# Altium PCB Archim_TF_Bottom.PcbDoc
Units mil, origin at the board's own origin, x right, y up, seen from the top; angles counter-clockwise.
Board outline 5100 x 5050 mil, 2 copper layers (Top Layer, Bottom Layer); 177 components, 0 nets, 177 pads, 0 vias.
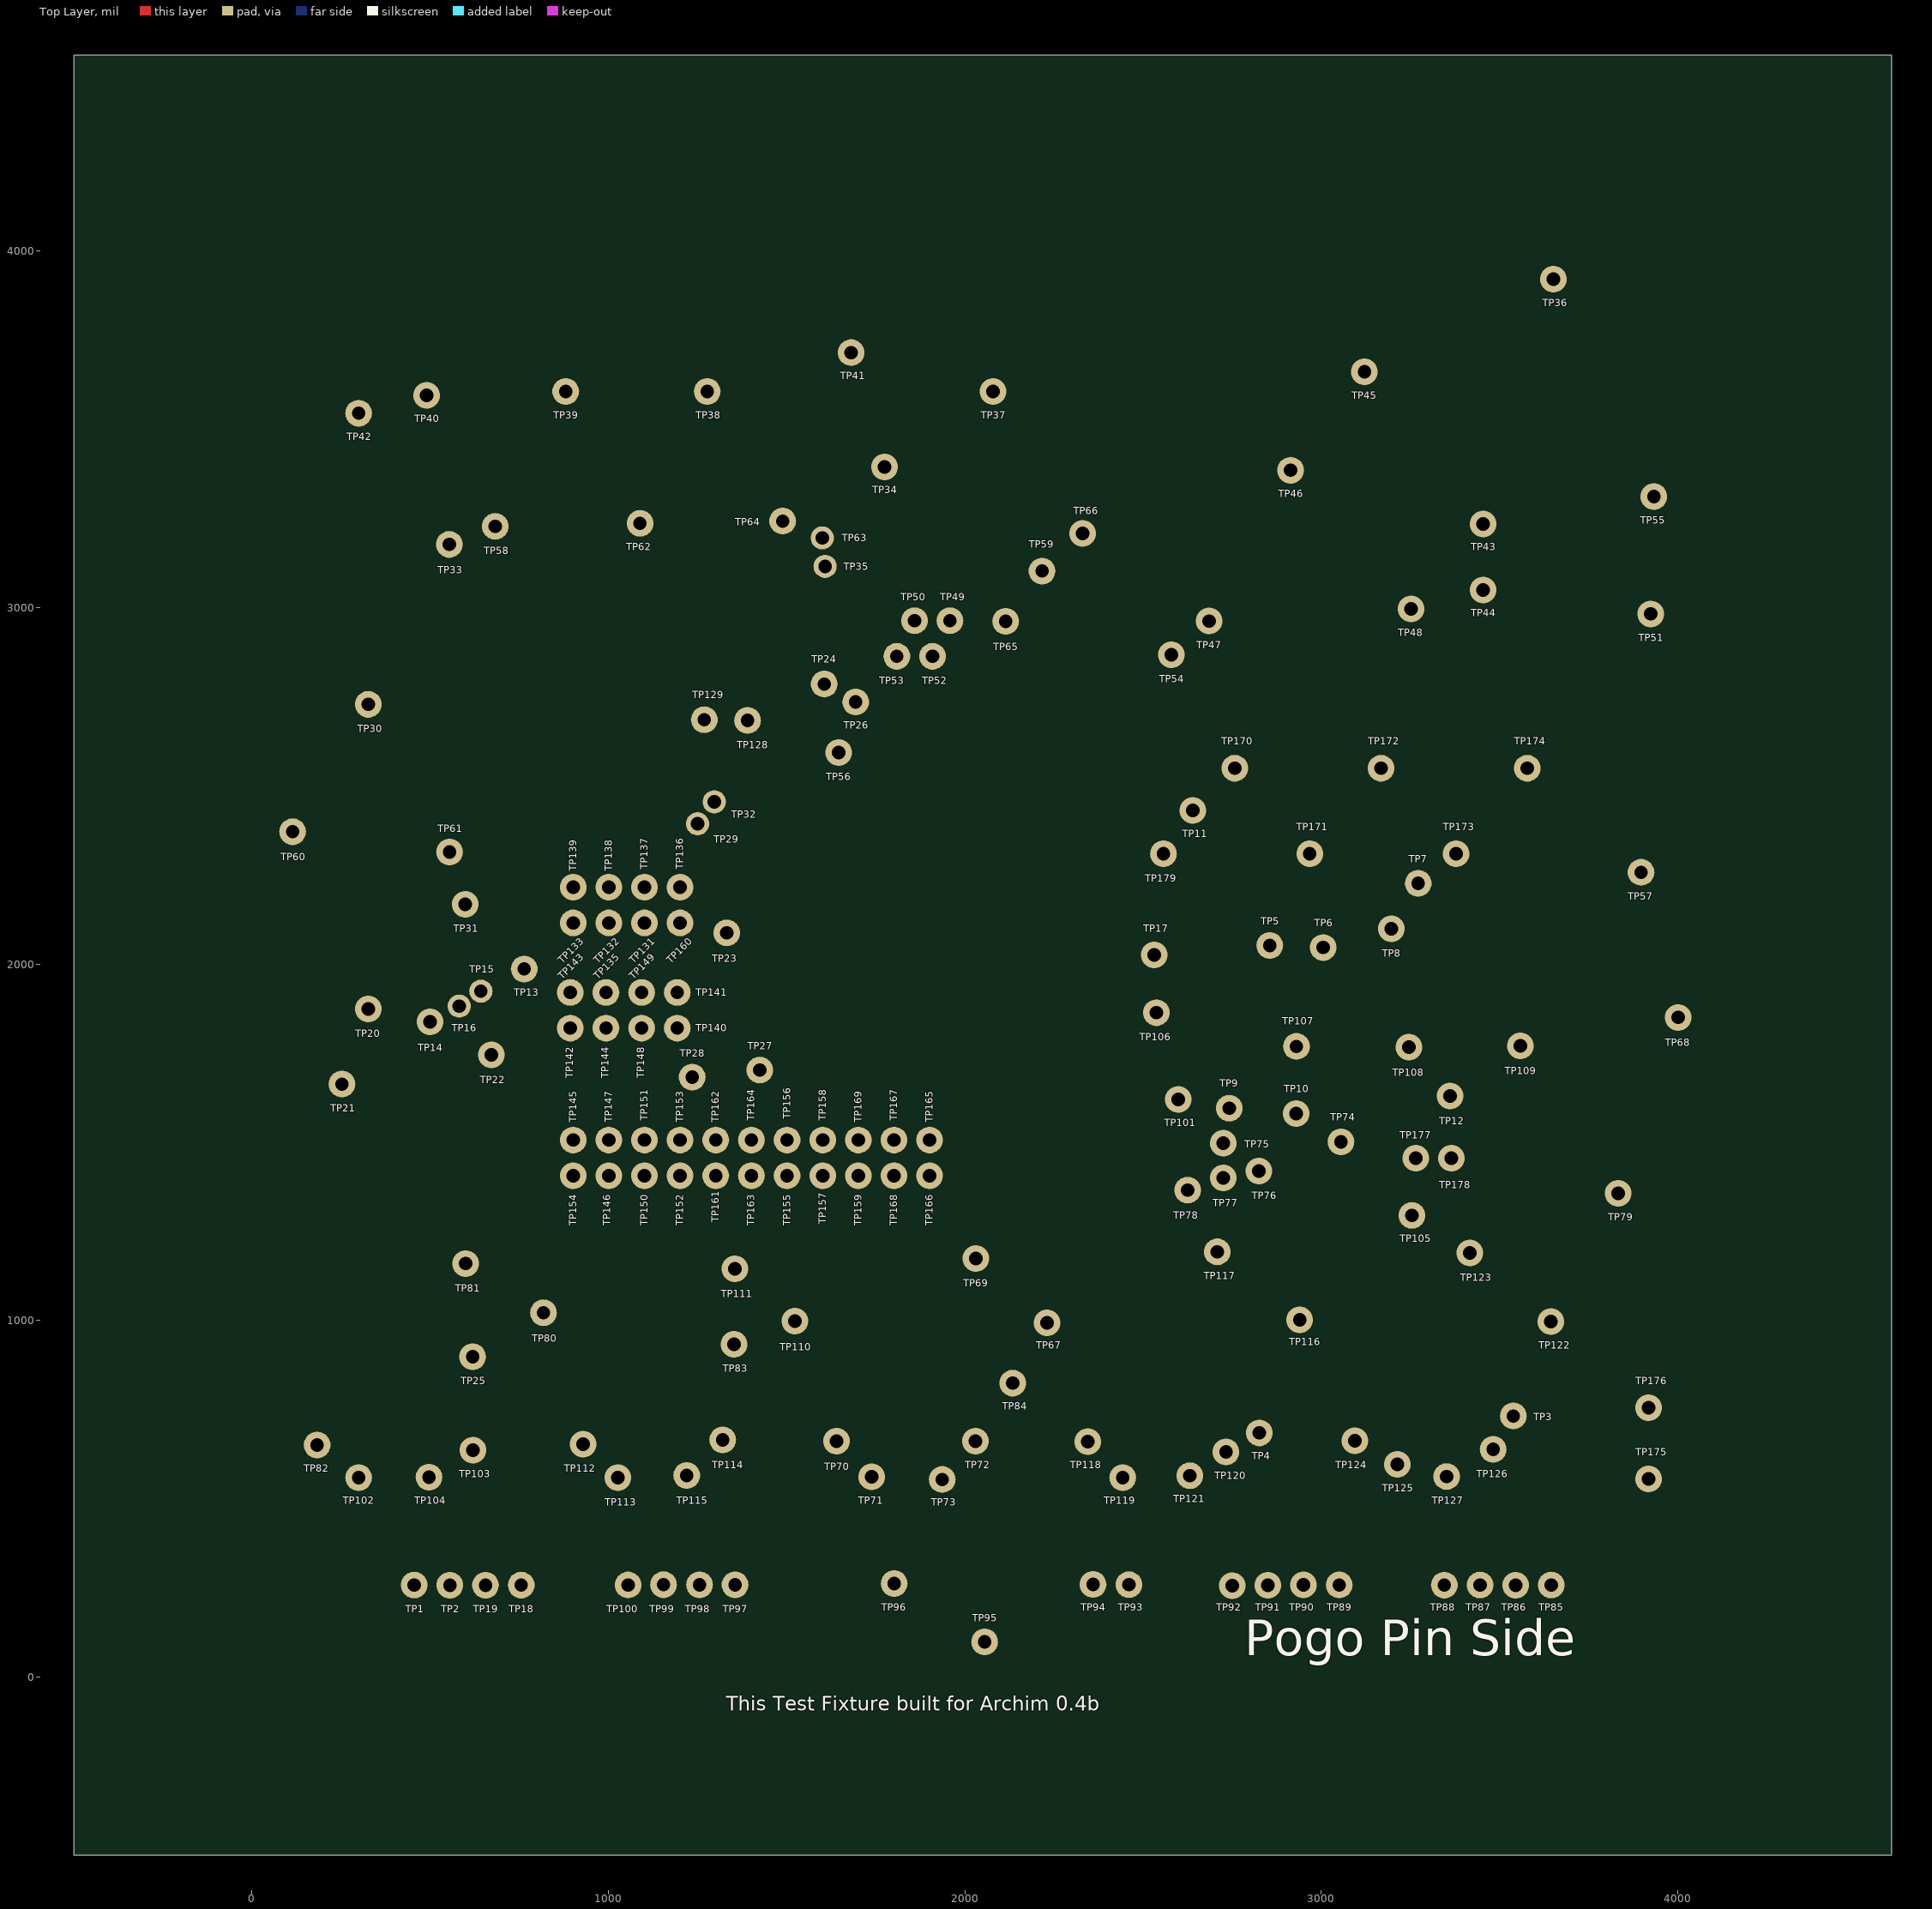
[diagram p0: Top Layer view]
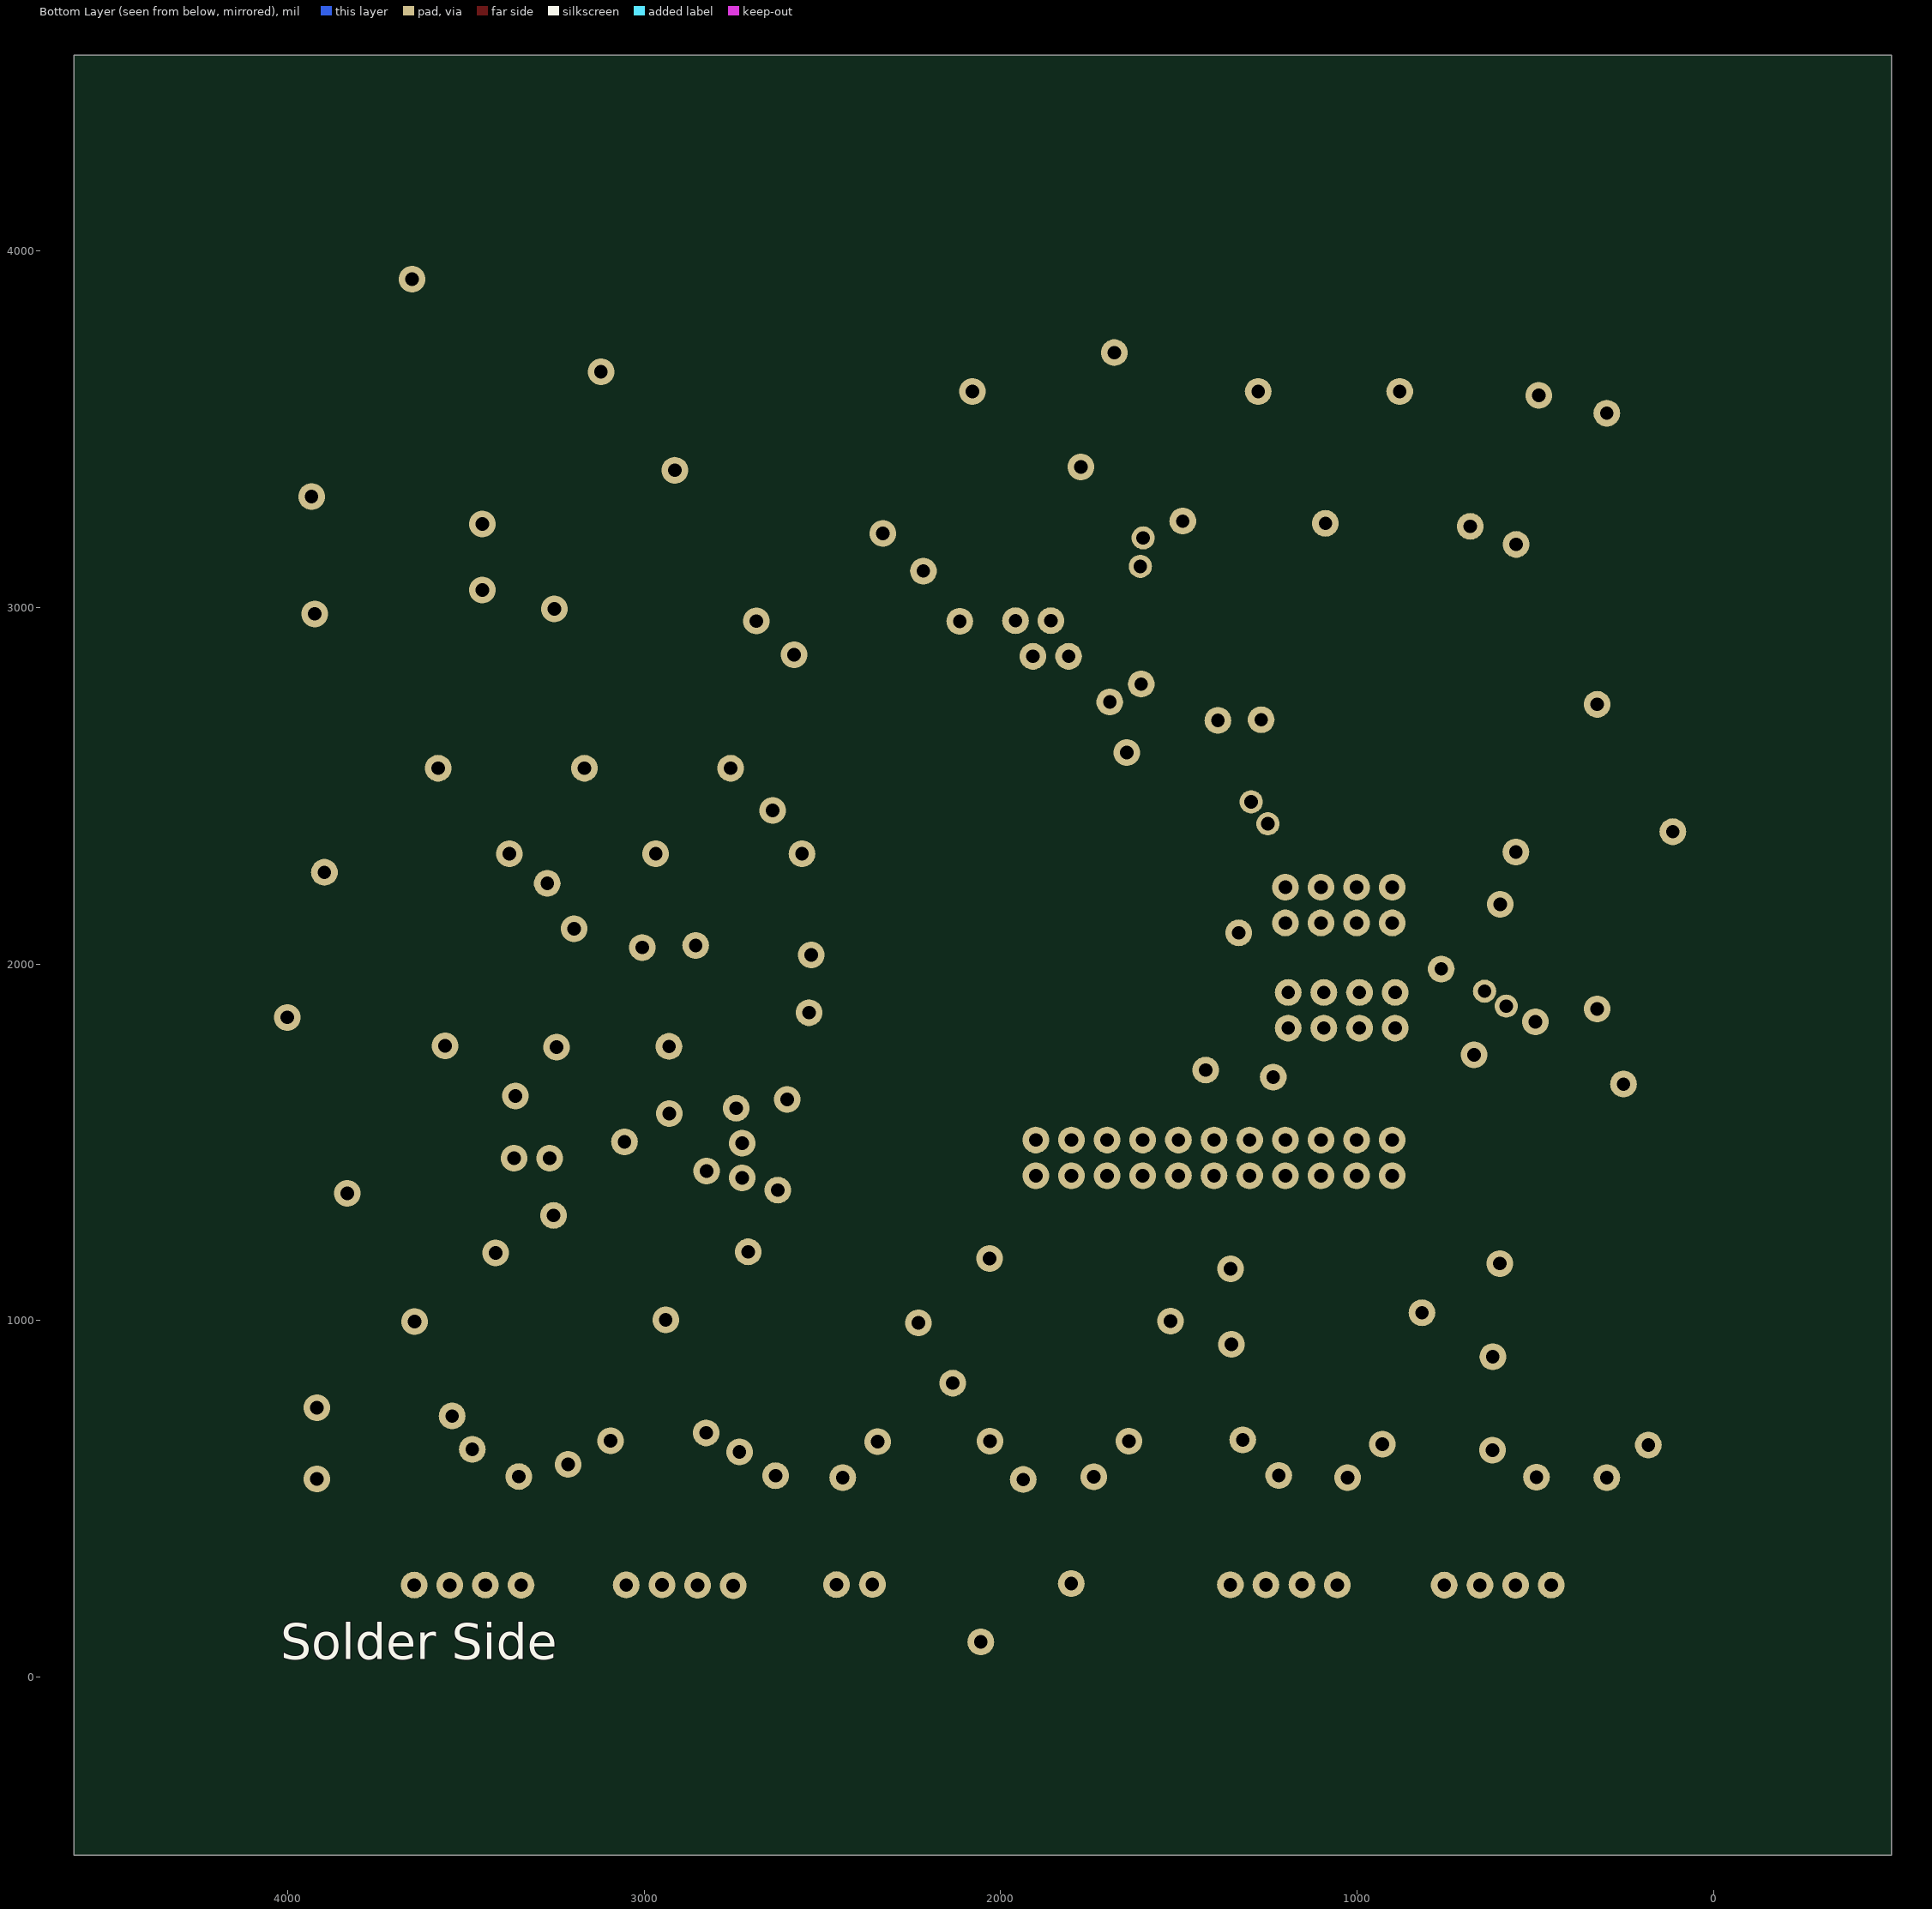
[diagram p1: Bottom Layer view, seen from below]

## Layer stack, top to bottom
Top Solder: solder mask 0.4, Solder Resist, Dk 3.5
Top Layer: signal copper 1.4
Dielectric 1: dielectric 12.6, FR-4, Dk 4.8
Bottom Layer: signal copper 1.4
Bottom Solder: solder mask 0.4, Solder Resist, Dk 3.5

## Board outline
-500,-500 -500,4550 4600,4550 4600,-500

## Design rules (kind name [scope] priority, off if disabled: settings)
Clearance [All] p1: gap=5
ComponentClearance [All] p1 off: gap=10 collisioncheckmode=3 verticalgap=10 showdistances=FALSE
PolygonConnect [All] p1: connectstyle=Relief reliefconductorwidth=10 reliefentries=4 polygonreliefangle="90 Angle" airgapwidth=10
RoutingVias [All] p1: holewidth=28 width=50 viastyle="Through Hole" minholewidth=28 minwidth=50 maxholewidth=28 maxwidth=50
SolderMaskExpansion [All] p1: expansion=4
Width [All] p1: maxlimit=10 minlimit=10 preferedwidth=10
29 further rules are at their usual default settings.

## Components (designator, comment, footprint, x,y, rotation, side; value= is the part's Value field where it differs from the comment)
TP1 "P100-T" POGO_38#1 455.07,257.55 r90 top locked
TP2 "P100-T" POGO_38#1 555.11,257.26 r90 top locked
TP3 "P100-T" POGO_38#1 3538.71,731.73 r90 top locked
TP4 "P100-T" POGO_38#1 2826.14,684.41 r90 top locked
TP5 "P100-T" POGO_38#1 2855.28,2051.98 r90 top locked
TP6 "P100-T" POGO_38#1 3005.38,2046.12 r90 top locked
TP7 "P100-T" POGO_38#1 3271.76,2226.09 r90 top locked
TP8 "P100-T" POGO_38#1 3196.57,2098.89 r90 top locked
TP9 "P100-T" POGO_38#1 2741.74,1595.23 r90 top locked
TP10 "P100-T" POGO_38#1 2929.38,1580.21 r90 top locked
TP11 "P100-T" POGO_38#1 2639.26,2430.44 r90 top locked
TP12 "P100-T" POGO_38#1 3361.1,1629.72 r90 top locked
TP13 "P100-T" POGO_38#1 763.61,1985.94 r270 top locked
TP14 "P100-T" POGO_38#1 499.36,1837.74 r270 top locked
TP15 "P100-T" POGO_38#2 641.95,1923.57 r270 top locked
TP16 "P100-T" POGO_38#2 581.2,1881.72 r270 top locked
TP17 "P100-T" POGO_38#1 2530.95,2025.32 r90 top locked
TP18 "P100-T" POGO_38#1 755.2,257.4 r90 top locked
TP19 "P100-T" POGO_38#1 655.01,257.07 r90 top locked
TP20 "P100-T" POGO_38#1 326.1,1873.72 r270 top locked
TP21 "P100-T" POGO_38#1 252.26,1662.8 r270 top locked
TP22 "P100-T" POGO_38#1 671.64,1744.99 r270 top locked
TP23 "P100-T" POGO_38#1 1331.65,2087.16 r270 top locked
TP24 "P100-T" POGO_38#1 1605.33,2785.13 r270 top locked
TP25 "P100-T" POGO_38#1 618.88,898.09 r90 top locked
TP26 "P100-T" POGO_38#1 1693.5,2734.88 r270 top locked
TP27 "P100-T" POGO_38#1 1424.39,1702.33 r270 top locked
TP28 "P100-T" POGO_38#1 1234.86,1682.67 r270 top locked
TP29 "P100-T" POGO_38#2 1249.97,2393.07 r270 top locked
TP30 "P100-T" POGO_38#1 325.83,2728.28 r270 top locked
TP31 "P100-T" POGO_38#1 598.26,2167.37 r270 top locked
TP32 "P100-T" POGO_38#2 1296.87,2454.68 r270 top locked
TP33 "P100-T" POGO_38#1 553.37,3176.95 r270 top locked
TP34 "P100-T" POGO_38#1 1774.74,3394.25 r270 top locked
TP35 "P100-T" POGO_38#2 1607.82,3115.3 r270 top locked
TP36 "P100-T" POGO_38#1 3651.08,3920.82 r90 top locked
TP37 "P100-T" POGO_38#1 2079,3606 r270 top locked
TP38 "P100-T" POGO_38#1 1277,3606 r270 top locked
TP39 "P100-T" POGO_38#1 880,3606 r90 top locked
TP40 "P100-T" POGO_38#1 490,3595 r180 top locked
TP41 "P100-T" POGO_38#1 1681,3715 r90 top locked
TP42 "P100-T" POGO_38#1 299,3545 r90 top locked
TP43 "P100-T" POGO_38#1 3454,3234 r90 top locked
TP44 "P100-T" POGO_38#1 3454,3049 r90 top locked
TP45 "P100-T" POGO_38#1 3121,3661 r0 top locked
TP46 "P100-T" POGO_38#1 2914,3385 r90 top locked
TP47 "P100-T" POGO_38#1 2685,2962 r90 top locked
TP48 "P100-T" POGO_38#1 3252,2996 r90 top locked
TP49 "P100-T" POGO_38#1 1958,2963 r180 top locked
TP50 "P100-T" POGO_38#1 1859,2963 r180 top locked
TP51 "P100-T" POGO_38#1 3924,2982 r0 top locked
TP52 "P100-T" POGO_38#1 1909,2863 r180 top locked
TP53 "P100-T" POGO_38#1 1809,2863 r180 top locked
TP54 "P100-T" POGO_38#1 2579,2867.6 r90 top locked
TP55 "P100-T" POGO_38#1 3933,3311 r90 top locked
TP56 "P100-T" POGO_38#1 1646,2593 r90 top locked
TP57 "P100-T" POGO_38#1 3897,2257 r90 top locked
TP58 "P100-T" POGO_38#1 682.01,3227.55 r270 top locked
TP59 "P100-T" POGO_38#1 2216.43,3102.28 r270 top locked
TP60 "P100-T" POGO_38#1 113.76,2370.99 r90 top locked
TP61 "P100-T" POGO_38#1 554.13,2313.98 r90 top locked
TP62 "P100-T" POGO_38#1 1088.47,3236.1 r270 top locked
TP63 "P100-T" POGO_38#2 1599.81,3195.25 r270 top locked
TP64 "P100-T" POGO_38#1 1488.67,3242.28 r270 top locked
TP65 "P100-T" POGO_38#1 2114.36,2961.17 r270 top locked
TP66 "P100-T" POGO_38#1 2330.2,3207.63 r270 top locked
TP67 "P100-T" POGO_38#1 2230.17,992.83 r270 top locked
TP68 "P100-T" POGO_38#1 4001,1850 r90 top locked
TP69 "P100-T" POGO_38#1 2030.63,1173.73 r270 top locked
TP70 "P100-T" POGO_38#1 1640,661.23 r270 top locked
TP71 "P100-T" POGO_38#1 1738.42,560.95 r270 top locked
TP72 "P100-T" POGO_38#1 2029.84,661.19 r270 top locked
TP73 "P100-T" POGO_38#1 1936.34,553.63 r270 top locked
TP74 "P100-T" POGO_38#1 3055.12,1500.98 r90 top locked
TP75 "P100-T" POGO_38#1 2725,1497 r180 top locked
TP76 "P100-T" POGO_38#1 2825,1419 r180 top locked
TP77 "P100-T" POGO_38#1 2725,1400 r180 top locked
TP78 "P100-T" POGO_38#1 2625,1365.5 r90 top locked
TP79 "P100-T" POGO_38#1 3833.05,1356.75 r90 top locked
TP80 "P100-T" POGO_38#1 817.67,1021.34 r270 top locked
TP81 "P100-T" POGO_38#1 599.14,1159.51 r270 top locked
TP82 "P100-T" POGO_38#1 182.54,650.37 r270 top locked
TP83 "P100-T" POGO_38#1 1352.2,932.66 r90 top locked
TP84 "P100-T" POGO_38#1 2134,824 r180 top locked
TP85 "P100-T" POGO_38#1 3645.02,257.5 r90 top locked
TP86 "P100-T" POGO_38#1 3544.97,257.19 r90 top locked
TP87 "P100-T" POGO_38#1 3445.14,257.48 r90 top locked
TP88 "P100-T" POGO_38#1 3345.14,257.36 r90 top locked
TP89 "P100-T" POGO_38#1 3050.17,257.72 r90 top locked
TP90 "P100-T" POGO_38#1 2949.94,257.8 r90 top locked
TP91 "P100-T" POGO_38#1 2850.01,256.9 r90 top locked
TP92 "P100-T" POGO_38#1 2749.96,255.81 r90 top locked
TP93 "P100-T" POGO_38#1 2460.31,258.64 r90 top locked
TP94 "P100-T" POGO_38#1 2359.56,259.04 r90 top locked
TP95 "P100-T" POGO_38#1 2055.49,97.88 r90 top locked
TP96 "P100-T" POGO_38#1 1801.51,261.69 r90 top locked
TP97 "P100-T" POGO_38#1 1355.14,258.33 r90 top locked
TP98 "P100-T" POGO_38#1 1255.5,258.47 r90 top locked
TP99 "P100-T" POGO_38#1 1154.44,258.58 r90 top locked
TP100 "P100-T" POGO_38#1 1055.15,257.68 r90 top locked
TP101 "P100-T" POGO_38#1 2598.81,1620.03 r90 top locked
TP102 "P100-T" POGO_38#1 299.02,559.02 r270 top locked
TP103 "P100-T" POGO_38#1 619.95,636.18 r270 top locked
TP104 "P100-T" POGO_38#1 496.47,560.23 r270 top locked
TP105 "P100-T" POGO_38#1 3253.95,1294.54 r90 top locked
TP106 "P100-T" POGO_38#1 2537.3,1863.29 r270 top locked
TP107 "P100-T" POGO_38#1 2930.16,1768.62 r270 top locked
TP108 "P100-T" POGO_38#1 3245.48,1766.37 r270 top locked
TP109 "P100-T" POGO_38#1 3558.15,1769.98 r270 top locked
TP110 "P100-T" POGO_38#1 1523.05,998.11 r270 top locked
TP111 "P100-T" POGO_38#1 1354.57,1144.79 r270 top locked
TP112 "P100-T" POGO_38#1 928.68,652.69 r270 top locked
TP113 "P100-T" POGO_38#1 1026.53,558.9 r270 top locked
TP114 "P100-T" POGO_38#1 1320.5,664.98 r270 top locked
TP115 "P100-T" POGO_38#1 1219.48,565.04 r270 top locked
TP116 "P100-T" POGO_38#1 2939.35,1001.52 r270 top locked
TP117 "P100-T" POGO_38#1 2708.12,1192.36 r270 top locked
TP118 "P100-T" POGO_38#1 2344.82,659.56 r270 top locked
TP119 "P100-T" POGO_38#1 2442.74,559.09 r270 top locked
TP120 "P100-T" POGO_38#1 2732.45,630.87 r270 top locked
TP121 "P100-T" POGO_38#1 2631.38,564.32 r270 top locked
TP122 "P100-T" POGO_38#1 3644.15,996.61 r270 top locked
TP123 "P100-T" POGO_38#1 3416.81,1189.48 r270 top locked
TP124 "P100-T" POGO_38#1 3094.09,662.21 r270 top locked
TP125 "P100-T" POGO_38#1 3213.27,595.91 r270 top locked
TP126 "P100-T" POGO_38#1 3482.12,638.22 r270 top locked
TP127 "P100-T" POGO_38#1 3351.48,561.97 r270 top locked
TP128 "P100-T" POGO_38#1 1390.19,2682.96 r90 top locked
TP129 "P100-T" POGO_38#1 1268.87,2685.03 r90 top locked
TP131 "P100-T" POGO_38#1 1101,2115 r90 top
TP132 "P100-T" POGO_38#1 1001,2115 r90 top
TP133 "P100-T" POGO_38#1 901,2115 r90 top
TP135 "P100-T" POGO_38#1 993,1920 r90 top
TP136 "P100-T" POGO_38#1 1201,2215 r90 top
TP137 "P100-T" POGO_38#1 1101,2215 r90 top
TP138 "P100-T" POGO_38#1 1001,2215 r90 top
TP139 "P100-T" POGO_38#1 901,2215 r90 top
TP140 "P100-T" POGO_38#1 1193,1820 r90 top
TP141 "P100-T" POGO_38#1 1193,1920 r90 top
TP142 "P100-T" POGO_38#1 893,1820 r90 top
TP143 "P100-T" POGO_38#1 893,1920 r90 top
TP144 "P100-T" POGO_38#1 993,1820 r90 top
TP145 "P100-T" POGO_38#1 901,1506 r90 top
TP146 "P100-T" POGO_38#1 1001,1406 r90 top
TP147 "P100-T" POGO_38#1 1001,1506 r90 top
TP148 "P100-T" POGO_38#1 1093,1820 r90 top
TP149 "P100-T" POGO_38#1 1093,1920 r90 top
TP150 "P100-T" POGO_38#1 1101,1406 r90 top
TP151 "P100-T" POGO_38#1 1101,1506 r90 top
TP152 "P100-T" POGO_38#1 1201,1406 r90 top
TP153 "P100-T" POGO_38#1 1201,1506 r90 top
TP154 "P100-T" POGO_38#1 901,1406 r90 top
TP155 "P100-T" POGO_38#1 1501,1406 r90 top
TP156 "P100-T" POGO_38#1 1501,1506 r90 top
TP157 "P100-T" POGO_38#1 1601,1406 r90 top
TP158 "P100-T" POGO_38#1 1601,1506 r90 top
TP159 "P100-T" POGO_38#1 1701,1406 r90 top
TP160 "P100-T" POGO_38#1 1201,2115 r90 top
TP161 "P100-T" POGO_38#1 1301,1406 r90 top
TP162 "P100-T" POGO_38#1 1301,1506 r90 top
TP163 "P100-T" POGO_38#1 1401,1406 r90 top
TP164 "P100-T" POGO_38#1 1401,1506 r90 top
TP165 "P100-T" POGO_38#1 1901,1506 r90 top
TP166 "P100-T" POGO_38#1 1901,1406 r90 top
TP167 "P100-T" POGO_38#1 1801,1506 r90 top
TP168 "P100-T" POGO_38#1 1801,1406 r90 top
TP169 "P100-T" POGO_38#1 1701,1506 r90 top
TP170 "P100-T" POGO_38#1 2757,2549 r90 top
TP171 "P100-T" POGO_38#1 2967.5,2309 r90 top
TP172 "P100-T" POGO_38#1 3167.5,2549 r90 top
TP173 "P100-T" POGO_38#1 3378,2309 r90 top
TP174 "P100-T" POGO_38#1 3578,2549 r90 top
TP175 "P100-T" POGO_38#1 3918,555 r90 top
TP176 "P100-T" POGO_38#1 3918,755 r90 top
TP177 "P100-T" POGO_38#1 3265,1455 r90 top
TP178 "P100-T" POGO_38#1 3365,1455 r90 top
TP179 "P100-T" POGO_38#1 2557,2309 r90 top

## Footprints (in the part's own frame and the unit in brackets; to place one, negate y for a bottom-side part, rotate by r counter-clockwise, add the part's x,y. Pads: shape width x height; smd on the part's side, far side on the other; paste and mask are expansions set on the pad)
POGO_38#1 [mil]
  round 75 hole 38: 1(0,0)
POGO_38#2 [mil]
  round 65 hole 38: 1(0,0)

## Part data
TP1 TP2 TP3 TP4 TP5 TP6 TP7 TP8 TP9 TP10 TP11 TP12 TP13 TP14 TP15 TP16 TP17 TP18 TP19 TP20 TP21 TP22 TP23 TP24 TP25 TP26 TP27 TP28 TP29 TP30 TP31 TP32 TP33 TP34 TP35 TP36 TP37 TP38 TP39 TP40 TP41 TP42 TP43 TP44 TP45 TP46 TP47 TP48 TP49 TP50 TP51 TP52 TP53 TP54 TP55 TP56 TP57 TP58 TP59 TP60 TP61 TP62 TP63 TP64 TP65 TP66 TP67 TP68 TP69 TP70 TP71 TP72 TP73 TP74 TP75 TP76 TP77 TP78 TP79 TP80 TP81 TP82 TP83 TP84 TP85 TP86 TP87 TP88 TP89 TP90 TP91 TP92 TP93 TP94 TP95 TP96 TP97 TP98 TP99 TP100 TP101 TP102 TP103 TP104 TP105 TP106 TP107 TP108 TP109 TP110 TP111 TP112 TP113 TP114 TP115 TP116 TP117 TP118 TP119 TP120 TP121 TP122 TP123 TP124 TP125 TP126 TP127 TP128 TP129 TP131 TP132 TP133 TP135 TP136 TP137 TP138 TP139 TP140 TP141 TP142 TP143 TP144 TP145 TP146 TP147 TP148 TP149 TP150 TP151 TP152 TP153 TP154 TP155 TP156 TP157 TP158 TP159 TP160 TP161 TP162 TP163 TP164 TP165 TP166 TP167 TP168 TP169 TP170 TP171 TP172 TP173 TP174 TP175 TP176 TP177 TP178 TP179: library part TestPoint, "Test Point"

## Nets (pads, with @x,y where several pads share a name; then routed paths per layer and width w, separated by ;. In a path a pad name is that pad's centre, name@x,y a point inside that pad or via, vN(x,y) a via of type N, cw(c..) or ccw(c..) an arc to the next point about the centre after c; other vN are vias at no path point)
pads on no net: TP1.1 TP2.1 TP3.1 TP4.1 TP5.1 TP6.1 TP7.1 TP8.1 TP9.1 TP10.1 TP11.1 TP12.1 TP13.1 TP14.1 TP15.1 TP16.1 TP17.1 TP18.1 TP19.1 TP20.1 TP21.1 TP22.1 TP23.1 TP24.1 TP25.1 TP26.1 TP27.1 TP28.1 TP29.1 TP30.1 TP31.1 TP32.1 TP33.1 TP34.1 TP35.1 TP36.1 TP37.1 TP38.1 TP39.1 TP40.1 TP41.1 TP42.1 TP43.1 TP44.1 TP45.1 TP46.1 TP47.1 TP48.1 TP49.1 TP50.1 TP51.1 TP52.1 TP53.1 TP54.1 TP55.1 TP56.1 TP57.1 TP58.1 TP59.1 TP60.1 TP61.1 TP62.1 TP63.1 TP64.1 TP65.1 TP66.1 TP67.1 TP68.1 TP69.1 TP70.1 TP71.1 TP72.1 TP73.1 TP74.1 TP75.1 TP76.1 TP77.1 TP78.1 TP79.1 TP80.1 TP81.1 TP82.1 TP83.1 TP84.1 TP85.1 TP86.1 TP87.1 TP88.1 TP89.1 TP90.1 TP91.1 TP92.1 TP93.1 TP94.1 TP95.1 TP96.1 TP97.1 TP98.1 TP99.1 TP100.1 TP101.1 TP102.1 TP103.1 TP104.1 TP105.1 TP106.1 TP107.1 TP108.1 TP109.1 TP110.1 TP111.1 TP112.1 TP113.1 TP114.1 TP115.1 TP116.1 TP117.1 TP118.1 TP119.1 TP120.1 TP121.1 TP122.1 TP123.1 TP124.1 TP125.1 TP126.1 TP127.1 TP128.1 TP129.1 TP131.1 TP132.1 TP133.1 TP135.1 TP136.1 TP137.1 TP138.1 TP139.1 TP140.1 TP141.1 TP142.1 TP143.1 TP144.1 TP145.1 TP146.1 TP147.1 TP148.1 TP149.1 TP150.1 TP151.1 TP152.1 TP153.1 TP154.1 TP155.1 TP156.1 TP157.1 TP158.1 TP159.1 TP160.1 TP161.1 TP162.1 TP163.1 TP164.1 TP165.1 TP166.1 TP167.1 TP168.1 TP169.1 TP170.1 TP171.1 TP172.1 TP173.1 TP174.1 TP175.1 TP176.1 TP177.1 TP178.1 TP179.1

## Silkscreen, mask and mechanical layers (free items; w line width, h text height)
Top Overlay:
  text "Pogo Pin Side" at 2785,60 h100
  text "This Test Fixture built for Archim 0.4b" at 1330,-95 h40
Bottom Overlay:
  text "Solder Side" at 4020,50 h100
DUT Outline:
  lines w10: 0,0 4100,0 4100,4050 0,4050 0,0
Outline:
  the board outline again, w10